# EAGLE board motor4 (Ryan Mcbee's conflicted copy 2015-02-10) (EAGLE 6.1)
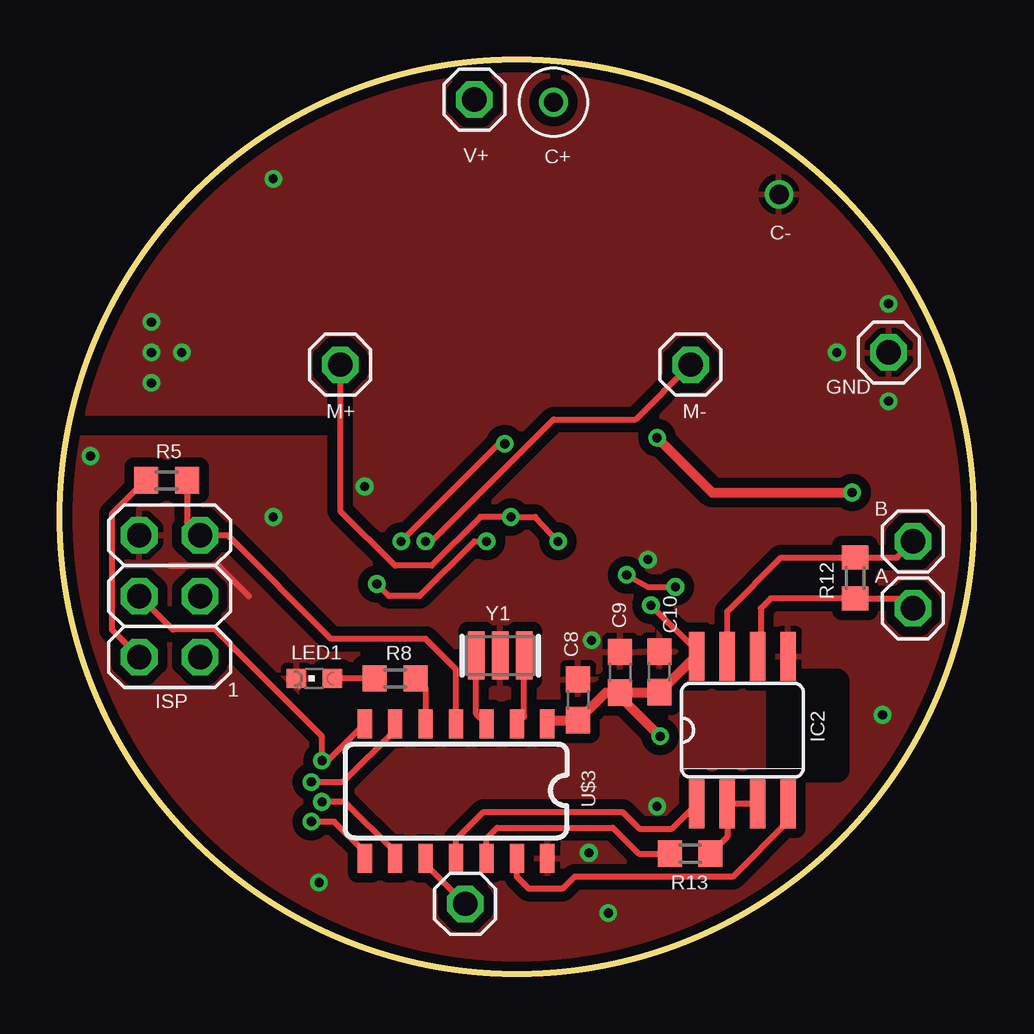
[diagram p0: board, top side]
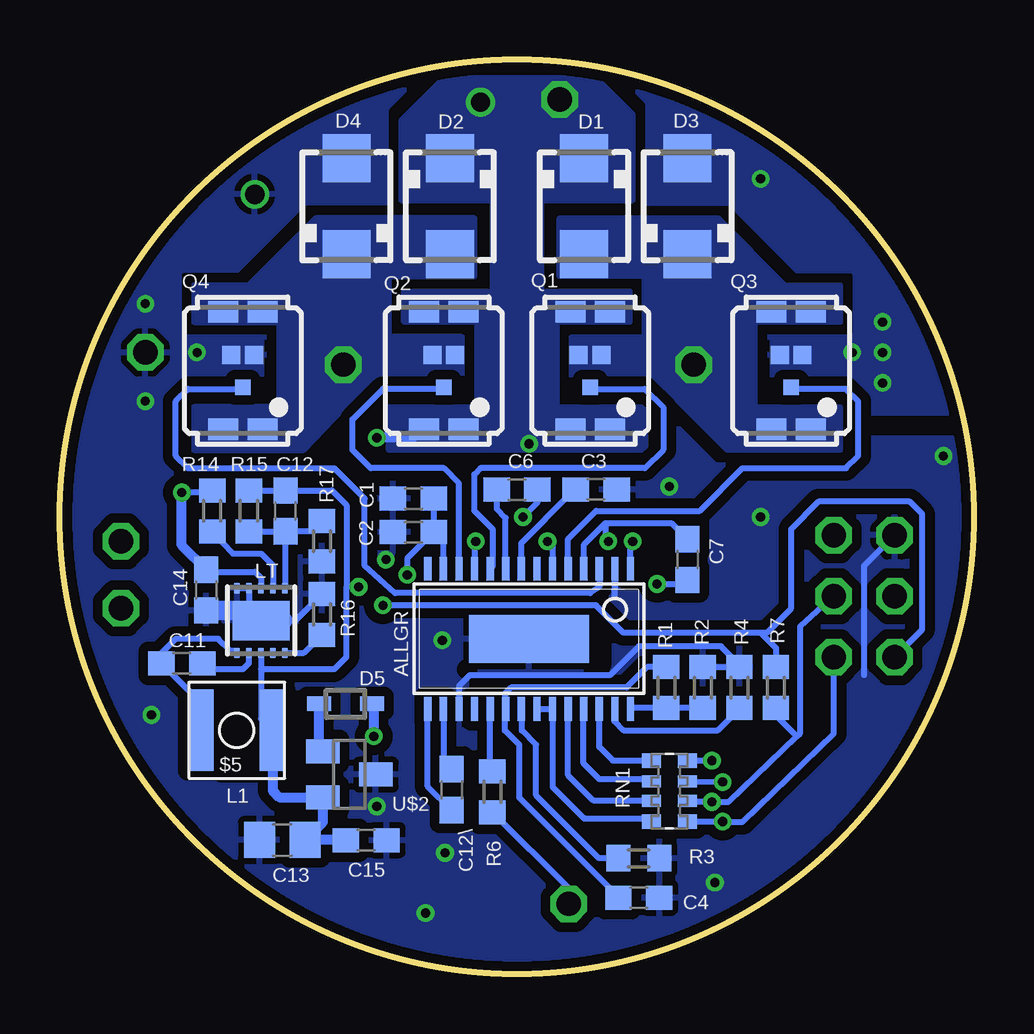
[diagram p1: board, bottom side, seen from below]

Size 38.1 x 38.1 mm. Coordinates in mm from the lower left corner, seen from the top.
Outline: circle at 19.05,19.05 radius 19.05
Copper layers (1*16): Top 0.0356mm / dielectric 1.5011mm / Bottom 0.0356mm
Design rules: minimum track width 6mil, minimum drill 13mil, track to track 6mil, track to pad 6mil, pad to pad 6mil, via to via 6mil, smd to smd 6mil, copper to edge 15mil, drill to drill 6mil, minimum pad ring 7mil, minimum via ring 7mil, stop-mask expansion 3mil, vias tented up to drill 0mil, thermal gap 10mil
tRestrict: area 30,8.5 to 32.4,12.2; 1 lines
bRestrict: area 30,8.5 to 31.4,12.2; 5 lines

## Footprints (pad centres in the part's own frame; a part is rotated, then mirrored left to right if it is on the bottom)
ASPI-4030S = smd 1.1 x 3.4: P$1 -1.5,0; P$2 1.5,0
1X01 = drill 1.016 octagon: 1 0,0
TSSOP28 = smd 0.305 x 0.991: 1 -4.225,-2.918; 2 -3.575,-2.918; 3 -2.925,-2.918; 4 -2.275,-2.918; 5 -1.625,-2.918; 6 -0.975,-2.918; 7 -0.325,-2.918; 8 0.325,-2.918; 9 0.975,-2.918; 10 1.625,-2.918; 11 2.275,-2.918; 12 2.925,-2.918; 13 3.575,-2.918; 14 4.225,-2.918; 15 4.225,2.918; 16 3.575,2.918; 17 2.925,2.918; 18 2.275,2.918; 19 1.625,2.918; 20 0.975,2.918; 21 0.325,2.918; 22 -0.325,2.918; 23 -0.975,2.918; 24 -1.625,2.918; 25 -2.275,2.918; 26 -2.925,2.918; 27 -3.575,2.918; 28 -4.225,2.918 | smd 5 x 2: P$1 0,0
C0603 = smd 1.1 x 1: 1 -0.85,0; 2 0.85,0
RADIAL-CAP = drill 0.8: P$1 -5.08,0; P$2 5.08,0
C0805 = smd 1.3 x 1.5: 1 -0.95,0; 2 0.95,0
SMA = smd 2 x 2: A 2,0; C -2,0
SOD323 = smd 1 x 0.6: 1 -1.1,0; 2 1.1,0
SO08 = smd 0.66 x 2.032: 1 -1.905,-3.073; 2 -0.635,-3.073; 3 0.635,-3.073; 4 1.905,-3.073; 5 1.905,3.073; 6 0.635,3.073; 7 -0.635,3.073; 8 -1.905,3.073
2X03 = drill 1.016 octagon: 1 -2.54,-1.27; 2 -2.54,1.27; 3 0,-1.27; 4 0,1.27; 5 2.54,-1.27; 6 2.54,1.27
CHIPLED_0603 = smd 0.8 x 0.8: A 0,-0.75; C 0,0.75
DFN10-3X3 = smd 0.25 x 0.45: 1 -1,-1.35; 2 -0.5,-1.35; 3 0,-1.35; 4 0.5,-1.35; 5 1,-1.35; 6 1,1.35; 7 0.5,1.35; 8 0,1.35; 9 -0.5,1.35; 10 -1,1.35 | smd 2.38 x 1.65: EXP 0,0
DIRECTFET = smd 0.9 x 1.25: D@1 -2.45,0.825; D@2 -2.45,-0.825; D@3 2.45,0.825; D@4 2.45,-0.825 | smd 0.65 x 0.65: G -0.7,0 | smd 0.75 x 0.75: S@1 0.65,0.475; S@2 0.65,-0.475
R0603 = smd 1 x 1.1: 1 -0.85,0; 2 0.85,0
EXB38V = smd 0.6 x 0.8: 1 -1.275,-0.75; 4 1.275,-0.75; 5 1.275,0.75; 8 -1.275,0.75 | smd 0.5 x 0.8: 2 -0.4,-0.75; 3 0.4,-0.75; 6 0.4,0.75; 7 -0.4,0.75
SOT23 = smd 1 x 1.4: 1 -0.95,-1.1; 2 0.95,-1.1; 3 0,1.1
SO14 = smd 0.6 x 1.2: 1 -3.81,-2.8; 2 -2.54,-2.8; 3 -1.27,-2.8; 4 0,-2.8; 5 1.27,-2.8; 6 2.54,-2.8; 7 3.81,-2.8; 8 3.81,2.8; 9 2.54,2.8; 10 1.27,2.8; 11 0,2.8; 12 -1.27,2.8; 13 -2.54,2.8; 14 -3.81,2.8
MYSMD2_RESONATOR = smd 0.7 x 2: 1 -1,0; 2 0,0; 3 1,0

## Placement (x,y rotation side)
$5  ASPI-4030S  [ASPI-4030S]  30.73,10.16 0 bottom
A  [1X01]  35.56,15.24 0 top
ALLGR  ALLEGRO-A3921  [TSSOP28]  18.54,13.97 180 bottom
B  [1X01]  35.56,18.03 0 top
B1  [1X01]  16.89,2.92 0 top
C1  1uF  [C0603]  23.37,19.81 180 bottom
C2  .1uF  [C0603]  23.37,18.41 180 bottom
C3  1uF  [C0603]  15.75,20.19 0 bottom
C4  .1uF  [C0603]  13.97,3.18 0 bottom
C5  RADIAL-CAP  [RADIAL-CAP]  25.27,34.42 337.8 top
C6  68nF  [C0603]  19.05,20.19 180 bottom
C7  68nF  [C0603]  11.94,17.27 270 bottom
C8  .1uF  [C0603]  21.6,11.43 90 top
C9  1uF  [C0603]  23.35,12.57 90 top
C10  .1uF  [C0603]  24.99,12.59 90 top
C11  .22uF  [C0603]  33.02,12.95 180 bottom
C12  22pF  [C0603]  28.7,19.3 270 bottom
C12\  1uF  [C0603]  21.78,7.68 270 bottom
C13  22uF  [C0805]  28.83,5.58 180 bottom
C14  2.2uF  [C0603]  32,16 270 bottom
C15  .1uF  [C0603]  25.34,5.57 0 bottom
D1  MRA4003T3G  [SMA]  16.26,32 270 bottom
D2  MRA4003T3G  [SMA]  21.84,32 270 bottom
D3  MRA4003T3G  [SMA]  11.94,32 90 bottom
D4  MRA4003T3G  [SMA]  26.16,32 90 bottom
D5  BAS40_SOD323  [SOD323]  26.2,11.26 180 bottom
GND  GND  [1X01]  34.54,25.91 0 top
IC2  MAX481CSA  [SO08]  28.45,10.16 0 top
ISP  [2X03]  4.57,15.75 90 top
LED1  [CHIPLED_0603]  10.6,12.32 90 top
LT  LT3990  [DFN10-3X3]  29.72,14.73 180 bottom
M+  [1X01]  11.68,25.4 0 top
M-  [1X01]  26.29,25.4 0 top
Q1  IRF6648  [DIRECTFET]  16,25.15 90 bottom
Q2  IRF6648  [DIRECTFET]  22.1,25.15 90 bottom
Q3  IRF6648  [DIRECTFET]  7.62,25.15 90 bottom
Q4  IRF6648  [DIRECTFET]  30.48,25.15 90 bottom
R1  10k  [R0603]  12.83,11.94 90 bottom
R2  1k  [R0603]  11.3,11.94 270 bottom
R3  3.3k  [R0603]  13.97,4.83 180 bottom
R4  3.3k  [R0603]  9.78,11.94 270 bottom
R5  10k  [R0603]  4.45,20.57 180 top
R6  5k  [R0603]  20.07,7.59 270 bottom
R7  33k  [R0603]  8.26,11.94 270 bottom
R8  1k  [R0603]  13.97,12.32 0 top
R12  120  [R0603]  33.15,16.51 90 top
R13  3k  [R0603]  26.27,5.02 180 top
R14  1k  [R0603]  31.75,19.3 90 bottom
R15  1M  [R0603]  30.23,19.3 90 bottom
R16  51k  [R0603]  27.18,14.99 270 bottom
R17  100K  [R0603]  27.18,18.03 90 bottom
RN1  5k  [EXB38V]  12.7,7.62 90 bottom
U$2  LM3480-5  [SOT23]  26.04,8.32 270 bottom
U$3  ATTINY84  [SO14]  16.51,7.62 180 top
V+  +48V  [1X01]  17.27,36.45 0 top
Y1  CSTCE16M0V53-R0  [MYSMD2_RESONATOR]  18.35,13.27 180 top

## Library data of the parts
$5 = evan; TAG: U$5
A B B1 GND ISP M+ M- V+ = pinhead
ALLGR C5 D1-D5 LT U$2 U$3 Y1 = evan
C1-C4 C6-C12 C12\ C13-C15 R1-R8 R12-R17 = rcl
IC2 = maxim; MF: MAXIM; MPN: MAX481CSA; OC_FARNELL: unknown; OC_NEWARK: 90C3817
LED1 = led
Q1-Q4 = transistor-power
RN1 = resistor-dil; OC_FARNELL: unknown; OC_NEWARK: unknown

## Nets
+5V: C8.1 C9.1 C10.1 D5.1 IC2.8 ISP.2 R5.2 R7.1 U$3.1
+5V-A: ALLGR.20 C4.1 R1.2
+12V: $5.P$2 ALLGR.13 C1.1 C2.1 C12.1 C13.1 C15.1 LT.8 R15.2 U$2.2
+48V: ALLGR.1 C5.P$1 C14.1 D1.C D2.C LT.3 Q1.D@1 Q1.D@2 Q1.D@3 Q1.D@4 Q2.D@1 Q2.D@2 Q2.D@3 Q2.D@4 R14.2 V+.1
DIRECTION: ALLGR.19 R6.1
EN: R13.2 U$3.12
FAULT1: ALLGR.25 RN1.6
FAULT2: ALLGR.26 RN1.5
GND: ALLGR.2 ALLGR.17 ALLGR.P$1 C1.2 C2.2 C3.2 C4.2 C5.P$2 C8.2 C9.2 C10.2 C13.2 C14.2 C15.2 D3.A D4.A GND.1 IC2.5 ISP.6 LED1.C LT.4 LT.5 LT.EXP Q3.S@1 Q3.S@2 Q4.S@1 Q4.S@2 R2.1 R3.1 R4.1 R16.1 R17.1 U$2.3 U$3.14 Y1.2
M+: ALLGR.11 C6.1 D1.A D3.C M+.1 Q1.S@1 Q1.S@2 Q3.D@1 Q3.D@2 Q3.D@3 Q3.D@4
M-: ALLGR.4 C7.1 D2.A D4.C M-.1 Q2.S@1 Q2.S@2 Q4.D@1 Q4.D@2 Q4.D@3 Q4.D@4
N$1: ALLGR.8 C3.1
N$2: ALLGR.16 C12\.1
N$3: ALLGR.15 C12\.2
N$4: ALLGR.10 Q1.G
N$5: ISP.1 RN1.1 U$3.8
N$6: ALLGR.12 Q2.G
N$7: ALLGR.3 Q4.G
N$8: ISP.4 RN1.4 U$3.7
N$9: ISP.5 R5.1 U$3.4
N$10: C11.1 LT.7
N$11: ALLGR.6 C7.2
N$12: ALLGR.9 C6.2
N$13: ALLGR.28 R1.1 R2.2
N$14: IC2.2 IC2.3 R13.1
N$15: $5.P$1 C11.2 LT.6
N$16: U$3.2 Y1.1
N$17: C12.2 LT.1 R15.1 R17.2
N$18: RN1.3 U$3.6
N$19: B1.1 R6.2 U$3.10
N$20: ALLGR.27 R4.2
N$21: ALLGR.5 Q3.G
N$22: LT.10 R16.2
N$23: ALLGR.21 R3.2
N$24: U$3.3 Y1.3
N$25: D5.2 U$2.1
N$26: LED1.A R8.1
N$27: LT.2 R14.1
N$28: R8.2 U$3.5
OIJWOIJ3: ISP.3 R7.2 RN1.2 U$3.9
PWM: ALLGR.22 ALLGR.23 RN1.8
RS485-A: B.1 IC2.7 R12.2
RS485-B: A.1 IC2.6 R12.1
RST: ALLGR.24 RN1.7
RX: IC2.1 U$3.11
TX: IC2.4 U$3.13

## Tracks (layer width: path | path; a pad name or v marks a point on that pad's centre or on a via)
+5V  (via drill 0.38, 0.38 pad 0.25)
  Top 0.254: R5.2 3.56,20.57 2.16,19.18 2.16,14.35 ISP.2 | v24.64,15.37 26.54,13.46 IC2.8
  Top 0.406: U$3.1 20.48,10.58 C8.1 22.75,11.72 23.2,11.72 | 23.2,11.72 C9.1 24.97,11.72 C10.1 26.48,13.23 IC2.8 | v25.02,9.91 23.2,11.72
  Bottom 0.254: ISP.2 2.16,14.35 2.16,19.18 2.67,19.69 6.48,19.69 7.62,18.54 7.62,15.24 8.64,14.22 8.89,14.22 | 8.89,14.22 14.61,14.22 15.75,15.37 v24.64,15.37 | 8.89,14.22 8.26,13.59 R7.1
  Bottom 0.406: D5.1 25.02,10.93 v25.02,9.91
+5V-A
  Bottom 0.254: R1.2 13.63,12.79 14.48,11.94 19.3,11.94 19.56,11.68 19.56,11.09 ALLGR.20 19.55,11.02 19.55,10.15 18.95,9.55 18.95,7.35 14.82,3.22 C4.1
+12V  (via drill 0.38 pad 0.25)
  Top 0.254: v23.62,16.64 24.51,16.13 v25.65,16.13
  Bottom 0.254: C1.1 C2.1 | ALLGR.13 22.12,18.01 C2.1 | LT.8 29.72,12.7 | 29.72,12.7 29.72,10.64 $5.P$2 | 26.16,16.13 26.16,19.56 26.76,20.15 C12.1 R15.2 | 29.72,12.7 26.67,12.7 26.16,13.21 26.16,16.13 | C2.1 23.62,17.31 v23.62,16.64 | v25.65,16.13 26.16,16.13
  Bottom 0.406: $5.P$2 29.23,7.64 28.96,7.37 U$2.2 27.14,6.32 C13.1 C15.1
+48V  (via drill 0.38 pad 0.25)
  Top 0.254: v14.22,18.03 18.29,22.1 v18.54,22.1
  Top 0.406: v24.89,22.35 27.18,20.07 v33.02,20.07
  Bottom 0.254: C14.1 31.92,16.76 29.97,16.76 29.72,16.51 LT.3 | Q2.D@1 23.39,22.35 | ALLGR.1 14.32,17.94 v14.22,18.03 | R14.2 31.84,20.07 v33.02,20.07
  Bottom 0.406: 23.39,22.35 v24.89,22.35 | v33.02,20.07 33.02,17.87 C14.1
  pour Bottom (isolate 0.406, rank 2, no thermals): 15.75,37.34 22.1,37.34 23.88,35.56 23.88,32.26 20.07,32.26 20.07,28.19 18.03,28.19 18.03,32.26 14.22,32.26 14.22,35.81
  pour Bottom (isolate 0.406, rank 2, no thermals): 17.4,23.62 13.72,23.62 13.72,21.84 24.38,21.84 24.38,23.62 20.7,23.62 20.7,27.18 23.75,27.18 23.75,28.45 14.35,28.45 14.35,27.18 17.4,27.18
DIRECTION
  Bottom 0.254: R6.1 20.17,8.62 ALLGR.19
EN
  Top 0.254: U$3.12 17.78,5.65 18.22,6.1 23.05,6.1 24.13,5.02 R13.2
FAULT1
  Bottom 0.254: ALLGR.25 16.27,8.77 15.62,8.13 13.56,8.13 RN1.6
FAULT2
  Bottom 0.254: ALLGR.26 15.62,9.46 15.05,8.9 RN1.5
GND  (via drill 0.38, 0.38 pad 0.25)
  Top 0.254: 4.57,17.02 6.6,17.02 7.87,15.75
  Bottom 0.254: 4.57,12.45 4.57,17.02 3.18,18.41 | 14.99,16 14.97,16.02 ALLGR.2 14.99,16.87 14.99,15.75 | LT.5 LT.4 30.22,15.23 30.14,15.15 | 28.7,14.73 28.28,14.73 R16.1 | R2.1 R4.1 9.78,12.89 10.54,13.65 13.97,13.65 15.18,12.45 21.02,12.45 21.46,12 ALLGR.17
  Bottom 0.61: LT.EXP 28.7,14.73
  Bottom 0.813: C14.2 30.14,15.15 LT.EXP
  other vias: 34.29,10.79 8.89,19.05 10.79,3.81 24.51,17.27 12.7,20.32 8.89,33.15 5.08,25.91 1.27,21.59 22.16,13.91 3.81,27.18 3.81,24.64 34.54,27.94 34.54,23.88 3.81,25.91 32.39,25.91 22.05,5.05 22.86,2.54 24.89,6.99
  pour Bottom (isolate 0.406, rank 2, no thermals): 33.27,26.54 29.72,26.54 29.72,24.89 33.27,24.89
  pour Bottom (isolate 0.406, rank 3): 19.05,38.1 arc-90 38.1,19.05 arc-90 19.05,0 arc-90 0,19.05 arc-90
  pour Top (isolate 0.406): 19.05,38.1 arc-90 38.1,19.05 arc-90 19.05,0 arc-90 0,19.05 arc-90
  pour Bottom (isolate 0.406, rank 2, no thermals): 8.38,26.54 4.83,26.54 4.83,24.89 8.38,24.89
  pour Bottom (no thermals): 10.29,32.77 13.34,32.77 13.34,35.43 10.29,35.43
  pour Bottom (no thermals): 24.77,32.77 27.81,32.77 27.81,35.43 24.77,35.43
M+  (via drill 0.38 pad 0.25)
  Top 0.254: v20.76,18.03 19.81,19.05 v18.8,19.05 17.53,19.05 15.49,17.02 13.97,17.02 11.68,19.3 M+.1
  Bottom 0.254: C6.1 18.2,19.65 v18.8,19.05 | ALLGR.11 20.82,17.98 v20.76,18.03
  pour Bottom (isolate 0.406, rank 2, no thermals): 5.59,21.84 10.29,21.84 13.34,24.89 16.76,24.89 16.76,26.54 13.72,26.54 13.72,29.08 17.27,29.08 17.27,31.5 10.67,31.5 7.87,28.7 5.59,28.7 5.59,27.18 9.14,27.18 9.14,23.62 5.59,23.62
M-  (via drill 0.38 pad 0.25)
  Top 0.254: v15.24,18.03 15.49,18.03 20.57,23.11 24,23.11 M-.1
  Bottom 0.254: ALLGR.4 16.26,16.9 16.26,17.91 15.37,18.8 | 15.37,18.8 12.61,18.8 C7.1 | 15.37,18.8 15.37,18.16 v15.24,18.03
  pour Bottom (isolate 0.406, rank 2, no thermals): 32.51,21.84 27.94,21.84 25.02,24.89 21.34,24.89 21.34,26.54 24.38,26.54 24.38,29.08 20.83,29.08 20.83,31.5 27.43,31.5 30.23,28.7 32.51,28.7 32.51,27.18 28.96,27.18 28.96,23.62 32.51,23.62
N$1
  Bottom 0.254: ALLGR.8 18.87,17.96 16.85,19.98 C3.1
N$2
  Bottom 0.254: ALLGR.16 22.12,8.87 C12\.1
N$3
  Bottom 0.254: C12\.2 22.77,7.82 ALLGR.15
N$4
  Bottom 0.254: ALLGR.10 20.07,16.99 20.07,18.54 20.83,19.3 20.83,20.83 20.57,21.08 13.72,21.08 12.95,21.84 12.95,23.62 13.72,24.38 15.94,24.38 Q1.G
N$5  (via drill 0.38)
  Top 0.254: U$3.8 12.7,5.08 11.43,6.35 v10.48,6.35
  Bottom 0.254: RN1.1 v10.48,6.35 v10.47,6.35 9.64,6.35 5.84,10.02 ISP.1
N$6
  Bottom 0.254: ALLGR.12 21.47,20.45 22.1,21.08 25.15,21.08 25.91,21.84 25.91,23.11 24.64,24.38 22.16,24.38 Q2.G 22.29,24.64
N$7
  Bottom 0.203: 30.67,24.38 Q4.G
  Bottom 0.254: ALLGR.3 15.62,16.13 16,15.88 24.13,15.88 25.4,17.02 25.4,19.81 26.67,21.08 32.77,21.08 33.27,21.59 33.27,23.88 32.77,24.38 30.67,24.38
N$8  (via drill 0.38)
  Top 0.254: U$3.7 11.18,8.9 11.11,8.9 v10.92,8.89 10.92,9.91 6.48,14.35 4.7,14.35 ISP.4
  Bottom 0.254: RN1.4 v10.93,8.9 v10.92,8.89
N$9
  Top 0.254: R5.1 5.29,18.84 ISP.5 6.99,18.29 11.3,13.97 15.24,13.97 16.51,12.7 U$3.4
N$10
  Bottom 0.254: LT.7 30.23,12.95 30.48,12.7 31.75,12.7 32,12.95 C11.1
N$11  (via drill 0.38 pad 0.25)
  Top 0.254: v17.78,18.03 17.27,18.03 14.99,15.75 13.72,15.75 v13.21,16.26
  Bottom 0.254: v17.78,18.03 17.57,17.82 ALLGR.6 | v13.21,16.26 12.1,16.26 C7.2
N$12
  Bottom 0.254: C6.2 19.9,19.39 19.52,19.01 ALLGR.9
N$13
  Bottom 0.254: R2.2 R1.1 14.28,11.09 ALLGR.28
N$14
  Top 0.254: IC2.3 IC2.2 27.81,5.71 R13.1
N$15
  Bottom 0.254: LT.6 30.8,13.46 30.99,13.46 31.5,13.97 33.27,13.97 33.87,13.37 C11.2 32.23,11.32 $5.P$1
N$16
  Top 0.254: U$3.2 19.35,10.72 Y1.1
N$17
  Bottom 0.254: R17.2 27.61,18.45 C12.2 | C12.2 28.72,18.44 LT.1 | R15.1 C12.2
N$18  (via drill 0.38)
  Top 0.254: 10.46,8.02 v10.48,8 11.81,8 13.97,10.16 U$3.6
  Bottom 0.254: RN1.3 10.66,8 v10.48,8
N$19
  Top 0.254: U$3.10 15.24,4.57 B1.1
  Bottom 0.254: R6.2 16.89,3.56 B1.1
N$20
  Bottom 0.254: ALLGR.27 14.99,11.03 14.99,10.54 14.61,10.16 10.67,10.16 9.78,11.05 R4.2
N$21
  Bottom 0.254: ALLGR.5 16.92,18.14 15.75,19.3 11.43,19.3 9.65,21.08 5.33,21.08 4.83,21.59 4.83,23.88 5.33,24.38 7.56,24.38 Q3.G
N$22
  Bottom 0.254: LT.10 27.93,13.38 R16.2
N$23
  Bottom 0.254: R3.2 15.63,4.83 18.25,7.45 18.25,9.55 18.85,10.15 18.85,11.04 ALLGR.21
N$24
  Top 0.254: U$3.3 17.35,10.85 Y1.3
N$25
  Bottom 0.406: U$2.1 27.3,9.43 D5.2
N$26
  Top 0.254: R8.1 LED1.A
N$27
  Bottom 0.254: R14.1 30.89,17.53 29.72,17.53 29.22,17.03 LT.2
N$28
  Top 0.254: R8.2 15.24,11.9 U$3.5
OIJWOIJ3  (via drill 0.38)
  Top 0.254: U$3.9 13.97,5.08 11.87,7.18 v10.92,7.18
  Bottom 0.254: RN1.2 11.91,7.18 v10.92,7.18 10.22,7.18 7.37,9.9 | ISP.3 7.24,14.48 7.24,10.03 7.37,9.9 | R7.2 8.26,10.78 7.37,9.9
PWM
  Bottom 0.254: ALLGR.22 ALLGR.23 17.57,7.79 16.26,6.48 13.58,6.48 RN1.8
RS485-A
  Top 0.254: IC2.7 27.81,15.11 30.06,17.36 R12.2 34.89,17.36 B.1
RS485-B
  Top 0.254: IC2.6 29.21,13.36 29.21,15.24 29.63,15.66 R12.1 35.14,15.66 A.1
RST
  Bottom 0.254: ALLGR.24 16.92,8.28 15.88,7.24 13.47,7.24 RN1.7
RX
  Top 0.254: U$3.11 16.51,5.61 17.65,6.75 23.45,6.75 24.15,6.05 25.51,6.05 IC2.1
TX
  Top 0.254: IC2.4 30.35,6.35 28.05,4.05 21.45,4.05 20.95,3.55 19.55,3.55 19.05,4.05 U$3.13

## Text on the board
tNames: C+ | C- | 1
bNames: L1
_tsilk: Evan Widloski | Purdue IEEE ROV | 2014-11-09 v4